# Altium PCB X_TRACK V3.1.PcbDoc (part 1 of 2)
Units mm, origin at the board's own origin, x right, y up, seen from the top; angles counter-clockwise.
Board outline 74 x 42.6 mm, 2 copper layers (Top Layer, Bottom Layer), stack 1.571 mm thick; 150 components, 90 nets, 449 pads, 235 vias.
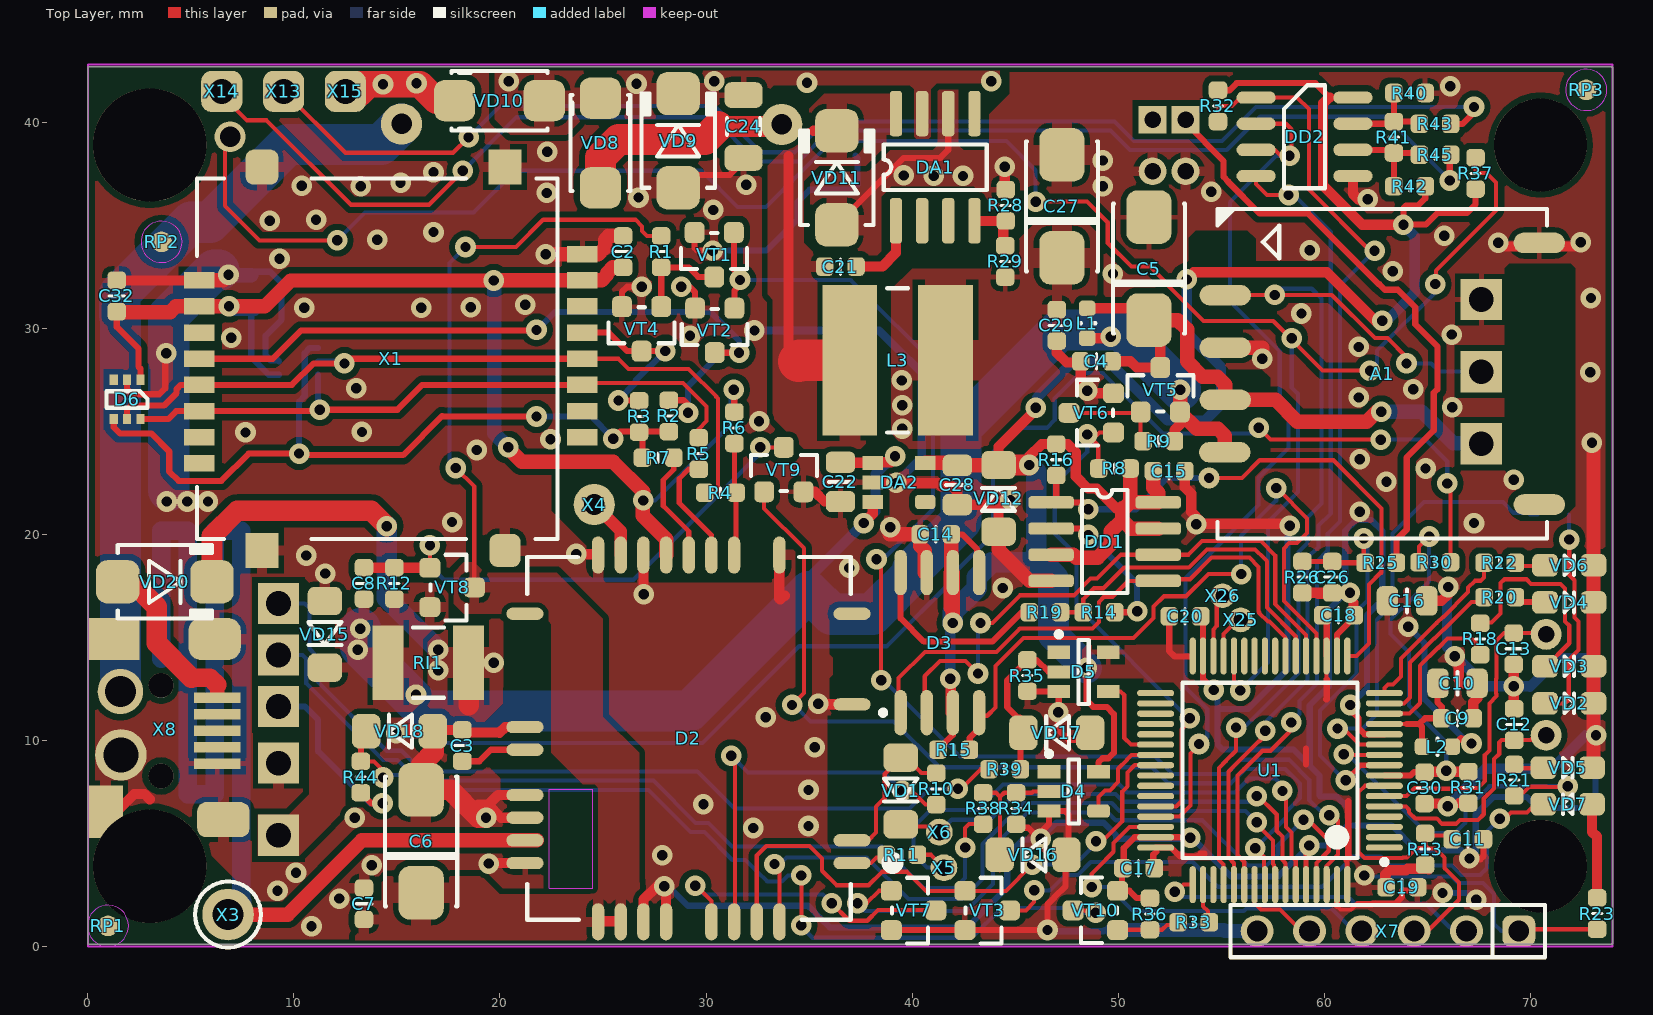
[diagram p0: Top Layer view]
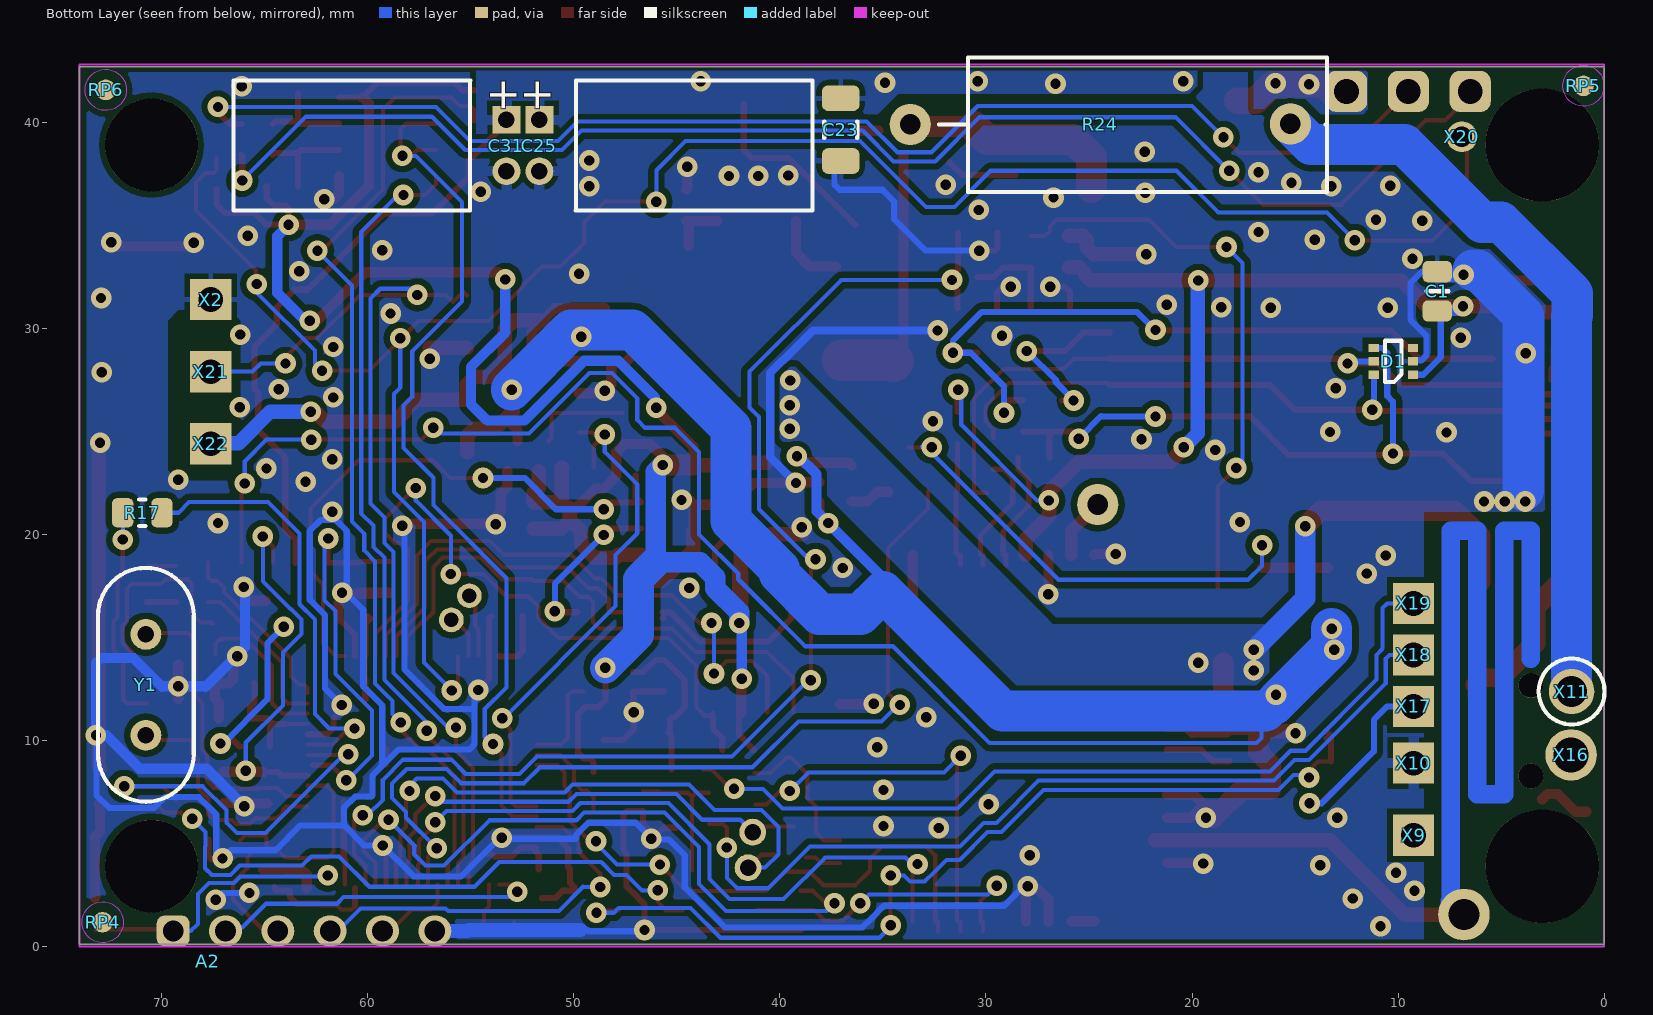
[diagram p1: Bottom Layer view, seen from below]

## Layer stack, top to bottom
Top Solder: solder mask 0.0102, Solder Resist, Dk 3.5
Top Layer: signal copper 0.0356
Dielectric1: dielectric 1.5, FR-4, Dk 4.8
Bottom Layer: signal copper 0.0356
Bottom Solder: solder mask 0.0102, Solder Resist, Dk 3.5

## Board outline
0,0.1 74,0.1 74,42.7 0,42.7

## Design rules (kind name [scope] priority, off if disabled: settings)
Clearance Clearance_1 [InPolygonClass('pol')] p1: gap=0.3
Clearance [All] p2: gap=0.2
ComponentClearance ComponentClearance_CL_SMD_05 [InComponentClass('CL_SMD_05')] p1: gap=0.5 collisioncheckmode=3 verticalgap=0.254 showdistances=FALSE
ComponentClearance [All] p2: gap=0.254 collisioncheckmode=3 verticalgap=0.254 showdistances=FALSE
HoleSize [All] p1: absolutevalues=TRUE maxlimit=10 minlimit=0.025 maxpercent=80.000 minpercent=20.000
MinimumSolderMaskSliver [All] p1 off: minsoldermaskwidth=0.254
PolygonConnect PolygonConnect_PC_2 [InPadClass('PC_2')] p1: connectstyle=Relief reliefconductorwidth=2 reliefentries=4 polygonreliefangle="90 Angle" airgapwidth=0.254
PolygonConnect PolygonConnect_PC_1.5 [InPadClass('PC_1.5')] p2: connectstyle=Relief reliefconductorwidth=1.5 reliefentries=4 polygonreliefangle="90 Angle" airgapwidth=0.254
PolygonConnect PolygonConnect_PC_1 [InPadClass('PC_1')] p3: connectstyle=Relief reliefconductorwidth=1 reliefentries=4 polygonreliefangle="90 Angle" airgapwidth=0.254
PolygonConnect PolygonConnect_PC_0.7 [InPadClass('PC_0.7')] p4: connectstyle=Relief reliefconductorwidth=0.7 reliefentries=4 polygonreliefangle="90 Angle" airgapwidth=0.254
PolygonConnect PolygonConnect_PC_O.5 [InPadClass('PC_0.5')] p5: connectstyle=Relief reliefconductorwidth=0.5 reliefentries=4 polygonreliefangle="90 Angle" airgapwidth=0.254
PolygonConnect PolygonConnect_PC_DC [InPadClass('PC_DC')] p6: connectstyle=Direct reliefconductorwidth=0.254 reliefentries=4 polygonreliefangle="90 Angle" airgapwidth=0.254
PolygonConnect PolygonConnect_vias [IsVia] p7: connectstyle=Direct reliefconductorwidth=0.254 reliefentries=4 polygonreliefangle="90 Angle" airgapwidth=0.254
PolygonConnect [All] p8: connectstyle=Relief reliefconductorwidth=0.254 reliefentries=4 polygonreliefangle="90 Angle" airgapwidth=0.254
RoomDefinition "X_TRACK_MCU V3.1" [InComponentClass('X_TRACK_MCU V3.1')] p1: confinementstyle=ConfineIn formatcopy=TRUE lockcomponents=FALSE outline -30,-30.6 231.725,-30.6 231.725,145.875 -30,145.875
RoomDefinition "X_TRACK_PWR V3.1" [InComponentClass('X_TRACK_PWR V3.1')] p2: confinementstyle=ConfineIn formatcopy=TRUE lockcomponents=FALSE outline -30,-30.6 601,-30.6 601,284.4 -30,284.4
RoutingVias [All] p1: holewidth=0.3 width=0.6 viastyle="Through Hole" minholewidth=0.3 minwidth=0.6 maxholewidth=3 maxwidth=6
SilkToBoardRegionClearance [All] p1 off:
SilkToSilkClearance [All] p1 off: silktosilkclearance=0.2
SilkToSolderMaskClearance SilkscreenOverComponentPads [IsPad] p1 off: minsilkscreentomaskgap=0.2 clearancetoexposedcopper=TRUE
SolderMaskExpansion [All] p1: expansion=0.102
Width [All] p1: maxlimit=10 minlimit=0.2 preferedwidth=0.3
24 further rules are at their usual default settings.

## Classes and differential pairs
component class CL_SMD_05: C1 C2 C3 C4 C6 C7 C8 C9 C10 C11 C12 C13 C14 C15 C16 C17 C18 C19 C20 C21 C22 C23 C24 C26 C27 C28 C29 C30 D1 L3 R1 R2 R3 R4 R5 R7 R9 R10 R11 R12 R13 R14 R15 R16 R17 R18 R19 R20 R21 R22 R23 R24 R25 R26 R28 R29 R30 R31 R32 R33 R34 R36 R37 R38 R39 R40 R41 R42 R43 R44 R45 VD1 VD2 VD3 VD4 VD5 VD6 VD7 VD8 VD9 VD10 VD11 VD12 VD15 VD16 VD17 VD18
pad class PC_2: L3-2
pad class PC_1.5: RI1-1 RI1-2
pad class PC_1: C6-1 C6-2 C27-1 C27-2 L3-1 VD8-1 VD8-2 VD9-1 VD9-2 VD10-1 VD10-2 VD11-1 VD11-2
pad class PC_0.5: C7-1 C7-2 C8-1 C8-2 C21-1 C21-2 C25-1 C25-2 C29-1 C29-2 C31-1 C31-2 D2-8 D2-13 D2-21 D2-34 D2-35 R12-1 R12-2 R13-1 VD15-1 VD15-2 VT8-1 VT8-2 VT8-3 X1-17 X1-18 X1-19 X1-20 X8-6 X8-7 X8-8 X8-9 X10-1
pad class PC_DC: DA1-1 DA1-2 DA1-3 DA1-4 DA1-5 DA1-6 DA1-7 DA1-8 R24-1 R24-2 X8-8 X9-1 X11-1 X15-1 X16-1
component class "X_TRACK_MCU V3.1": A1 A2 C1 C2 C3 C4 C5 C6 C7 C8 C9 C10 C11 C12 C13 C14 C15 C16 C17 C18 C19 C20 C32 D1 D2 D3 D6 DD1 L1 L2 R1 R2 R3 R4 R5 R6 R7 R8 R9 R10 R11 R12 R13 R14 R15 R16 R17 R18 R19 R20 R21 R22 R23 RP1 RP2 RP3 RP4 RP5 RP6 U1 VD1 VD2 VD3 VD4 VD5 VD6 VD7 VT1 VT2 VT3 VT4 VT5 VT6 VT7 VT8 VT9 X1 X2 X3 X4 X5 X6 X7 X21 X22 X25 X26 Y1
component class "X_TRACK_PWR V3.1": C21 C22 C23 C24 C25 C26 C27 C28 C29 C30 C31 D4 D5 DA1 DA2 DD2 L3 R24 R25 R26 R28 R29 R30 R31 R32 R33 R34 R35 R36 R37 R38 R39 R40 R41 R42 R43 R44 R45 RI1 VD8 VD9 VD10 VD11 VD12 VD15 VD16 VD17 VD18 VD20 VT10 X8 X9 X10 X11 X13 X14 X15 X16 X17 X18 X19 X20
polygon class pol: GND_bot GND_top

## Components (designator, comment, footprint, x,y, rotation, side; value= is the part's Value field where it differs from the comment)
A1 "L80" L80 62.825,27.8 r180 top
A2 "AB" AB 67.775,-0.725 r180 bottom locked
C1 "CC0805_100nF" CC0805 8.1,31.8 r90 bottom
C2 "CC0603_100nF" CC0603 25.975,33.725 r270 top
C3 "CC0603_1uF" CC0603 18.175,9.75 r270 top
C4 "CC0603_100nF" CC0603 48.95,28.4 r180 top
C5 "C_TAJ 100uF 6.3V C" 6032_TC 51.5,32.9 r90 top
C6 "C_TAJ 100uF 6.3V C" 6032_TC 16.175,5.1 r90 top
C7 "CC0603_100nF" CC0603 13.4,2.075 r90 top
C8 "CC0603_100nF" CC0603 13.4,17.625 r90 top
C9 "CC0603_10nF" CC0603 66.475,11.075 r0 top
C10 "CC0805_1uF" CC0805 66.475,12.775 r180 top
C11 "CC0603_100nF" CC0603 66.975,5.2 r0 top
C12 "CC0603_22pF" CC0603 69.225,10.775 r90 top
C13 "CC0603_22pF" CC0603 69.2,14.45 r270 top
C14 "CC0603_100nF" CC0603 41.15,20 r180 top
C15 "CC0603_100nF" CC0603 52.475,23.075 r0 top
C16 "CC0805_10uF" CC0805 64.025,16.775 r180 top
C17 "CC0603_100nF" CC0603 51,3.8 r180 top
C18 "CC0603_100nF" CC0603 60.7,16.075 r0 top
C19 "CC0603_100nF" CC0603 63.775,2.875 r0 top
C20 "CC0603_100nF" CC0603 53.25,16.025 r0 top
C21 "CC0603_10nF" CC0603 36.525,33 r0 top
C22 "CC0805_10uF" CC0805 36.525,22.55 r90 top
C23 "CC1206_10uF" CC1206 37.05,39.65 r90 bottom
C24 "CC1206_10uF" CC1206 31.825,39.8 r90 top
C25 "C_ECR_100uF 35V_(D6)" "CAPPR2.5-6.3X11.5 - HR" 51.675,38.875 r180 bottom
C26 "CC0603_10nF" CC0603 60.4,17.925 r270 top
C27 "C_TAJ 100uF 6.3V C" 6032_TC 47.275,35.925 r90 top
C28 "CC0805_10uF" CC0805 42.2,22.4 r90 top
C29 "CC0603_100nF" CC0603 47.028,30.15 r90 top
C30 "CC0603_10nF" CC0603 64.875,7.7 r270 top
C31 "C_ECR_100uF 35V_(D6)" "CAPPR2.5-6.3X11.5 - HL" 53.275,38.875 r180 bottom
C32 "CC0603_100nF" CC0603 1.4,31.575 r90 top
D1 "SMF05C" sc70-6 10.225,28.4 r90 bottom
D2 "SIM800C" SIM800C 21.3,1.3 r180 top locked
D3 "AT45DB" 8S2_N_2 41.35,14.75 r0 top
D4 "SN74AHC1G14DBVR" SOT23-5AN#1 47.85,7.525 r0 top
D5 "SN74AHC1G14DBVR" SOT23-5AN#2 48.325,13.325 r0 top
D6 "SMF05C" sc70-6 1.9,26.55 r180 top
DA1 "TPS5420" SO8 41.125,37.825 r0 top
DA2 "TPS76330DBV" SOT23-5 38.1,23.475 r0 top
DD1 "FM25CL64" SO8 49.35,19.65 r270 top
DD2 "SN75176" 8S1_L 59.05,39.3 r0 top
L1 "L_CIC10P601NC" BLM18 48.5,30.25 r270 top
L2 "L_CIC10P601NC" BLM18 65.5,9.7 r180 top
L3 "CDRH6D38" CDRH6D38 39.3,28.45 r0 top
R1 "RC0603 10k" RC0603 27.825,33.725 r90 top
R2 "RC0603 1k" RC0603 28.2,25.75 r90 top
R3 "RC0603 1k" RC0603 26.75,25.725 r90 top
R4 "RC0603 22R" RC0603 30.7,22.025 r180 top
R5 "RC0603 22R" RC0603 29.65,23.925 r90 top
R6 "RC0603 10k" RC0603 31.375,25.175 r90 top
R7 "RC0603 22R" RC0603 27.675,23.725 r180 top
R8 "RC0603 1k" RC0603 49.825,23.2 r180 top
R9 "RC0603 100k" RC0603 51.975,24.525 r180 top
R10 "RC0603 10k" RC0603 41.175,7.65 r90 top
R11 "RC0603 120R" RC0603 39.5,4.45 r0 top
R12 "RC0603 100k" RC0603 14.875,17.625 r90 top
R13 "RC0603 10k" RC0603 64.9,4.725 r90 top
R14 "RC0603 1k" RC0603 49.075,16.225 r180 top
R15 "RC0603 10k" RC0603 42.025,9.55 r0 top
R16 "RC0603 10k" RC0603 47,23.625 r270 top
R17 "RC0805 1k" RC0805 70.95,21.05 r0 bottom
R18 "RC0603 300R" RC0603 67.575,14.925 r270 top
R19 "RC0603 1k" RC0603 46.45,16.225 r0 top
R20 "RC0603 300R" RC0603 68.525,16.95 r180 top
R21 "RC0603 300R" RC0603 69.225,8.075 r270 top
R22 "RC0603 300R" RC0603 68.525,18.625 r180 top
R23 "RC0603 300R" RC0603 73.25,1.6 r90 top
R24 "R_MFR03W" "MFR300- 3W-23-17.5X6.5" 22.175,39.9 r0 bottom
R25 "RC0603 15k" RC0603 62.75,18.625 r180 top
R26 "RC0603 1k" RC0603 58.95,17.925 r270 top
R28 "RC0603 3k3" RC0603 44.55,35.975 r90 top
R29 "RC0603 8k2" RC0603 44.525,33.25 r90 top
R30 "RC0603 100k" RC0603 65.375,18.65 r180 top
R31 "RC0603 100k" RC0603 67,7.725 r270 top
R32 "RC0603 15k" RC0603 54.85,40.8 r270 top
R33 "RC0603 3k3" RC0603 53.675,1.175 r0 top
R34 "RC0603 100k" RC0603 45.05,6.7 r270 top
R35 "RC0603 100k" RC0603 45.6,13.15 r270 top
R36 "RC0603 33k" RC0603 51.55,1.575 r90 top
R37 "RC0603 5k1" RC0603 67.35,37.525 r90 top
R38 "RC0603 4k7" RC0603 43.45,6.7 r270 top
R39 "RC0603 4k7" RC0603 44.5,8.6 r180 top
R40 "RC0603 1k5" RC0603 64.15,41.425 r180 top
R41 "RC0603 120R" RC0603 63.387,39.275 r270 top
R42 "RC0603 1k5" RC0603 64.15,36.9 r0 top
R43 "RC0603 120R" RC0603 65.387,39.925 r0 top
R44 "RC0603 10R" RC0603 13.25,8.225 r270 top
R45 "RC0603 120R" RC0603 65.387,38.425 r0 top
RI1 "POLY_PTS" "FSMD1812 Series" 16.525,13.775 r0 top
RP1 "Reper point" REPER_1_2 0.975,1 r0 top
RP2 "Reper point" REPER_1_2 3.575,34.2 r90 top
RP3 "Reper point" REPER_1_2 72.725,41.575 r90 top
RP4 "Reper point" REPER_1_2 72.875,1.175 r90 bottom
RP5 "Reper point" REPER_1_2 1,41.775 r90 bottom
RP6 "Reper point" REPER_1_2 72.725,41.575 r90 bottom
U1 "STM32F103RCT6" LQFP64_N 57.375,8.55 r180 top
VD1 "BAS85" SOD80D_C 39.45,7.55 r270 top
VD2 "LED_KP-2012EC(0805)_1" KP-2012EC 71.9,11.8 r0 top
VD3 "LED_KP-2012EC(0805)_1" KP-2012EC 71.9,13.6 r0 top
VD4 "LED_KP-2012EC(0805)_1" KP-2012EC 71.9,16.7 r0 top
VD5 "LED_KP-2012EC(0805)_1" KP-2012EC 71.825,8.675 r0 top
VD6 "LED_KP-2012EC(0805)_1" KP-2012EC 71.9,18.5 r0 top
VD7 "LED_KP-2012EC(0805)_1" KP-2012EC 71.825,6.9 r180 top
VD8 "M7" SMA/DO-214AC 24.875,40.675 r270 top
VD9 "Suppressor" SMB/DO-214AA 28.65,36.825 r270 top
VD10 "M7" SMA/DO-214AC 18.3,41.05 r0 top
VD11 "SS24" SMB/DO-214AA 36.35,35.025 r270 top
VD12 "Zener" SOD80D_C 44.2,21.75 r90 top
VD15 "Zener" SOD80D_C 11.5,15.15 r270 top
VD16 "Zener" SOD80D_C 45.875,4.45 r180 top
VD17 "Zener" SOD80D_C 47.025,10.375 r180 top
VD18 "LL4148" SOD80D_C 15.125,10.45 r180 top
VD20 "SS24" SMB/DO-214AA 1.45,17.7 r180 top
VT1 "PDTC123ET" SOT23 30.4,33.575 r180 top
VT2 "PDTC123ET" SOT23 30.425,29.9 r180 top
VT3 "PDTC123ET" SOT23 43.65,1.75 r270 top
VT4 "PDTC123ET" SOT23 26.875,29.975 r180 top
VT5 "IRLML6302" SOT23 52.05,27.025 r0 top
VT6 "PDTC123ET" SOT23 48.7,25.9 r90 top
VT7 "PDTC123ET" SOT23 40.075,1.75 r270 top
VT8 "IRLML6401" SOT23 17.675,17.425 r270 top
VT9 "PDTC123ET" SOT23 33.775,23.15 r0 top
VT10 "BC817" SOT23 48.9,1.75 r90 top
X1 "SI13С-08201" SI13C-08201 14.6,28.525 r270 top locked
X2 "Con 1" TP_0.8/1.5#1 67.625,31.4 r180 bottom
X3 "Con_1" TP_1.5/2.5#1 6.8,1.55 r0 top
X4 "Con_1" TP_1/2#1 24.575,21.45 r0 top
X5 "Con 1" TP_0.8/1.5#2 41.55,3.825 r0 top
X6 "Con 1" TP_0.8/1.5#2 41.325,5.55 r0 top
X7 "CON_1x6_" PLS6 69.45,0.75 r180 top
X8 "MSB-SW-5B" MSB-SW-5B 3.4,10.475 r270 top
X9 "Con 1" TP_1/2#2 9.25,5.4 r180 bottom
X10 "Con 1" TP_1/2#2 9.25,8.9 r180 bottom
X11 "Con_1" TP_1.5/2.5#2 1.575,12.375 r180 bottom
X13 "Con_1" TP_1/2#3 9.5,41.5 r0 top
X14 "Con_1" TP_1/2#3 6.5,41.5 r0 top
X15 "Con_1" TP_1/2#3 12.5,41.5 r0 top
X16 "Con_1" TP_1/2#4 1.6,9.3 r90 bottom
X17 "Con_1" TP_1/2#2 9.25,11.65 r270 bottom
X18 "Con_1" TP_1/2#2 9.25,14.15 r0 bottom
X19 "Con_1" TP_1/2#2 9.25,16.65 r180 bottom
X20 "Con_1" TP_1/2#5 6.9,39.3 r180 bottom
X21 "Con 1" TP_0.8/1.5#1 67.625,27.9 r180 bottom
X22 "Con 1" TP_0.8/1.5#1 67.625,24.4 r90 bottom
X25 "Con 1" "TP_0.5/1.0 - WITHOUT SILKSCREEN" 55.95,15.85 r90 top
X26 "Con 1" "TP_0.5/1.0 - WITHOUT SILKSCREEN" 55.075,17.025 r90 top
Y1 "XTAL" CRYSTAL 70.775,12.7 r270 bottom

## Footprints (in the part's own frame and the unit in brackets; to place one, negate y for a bottom-side part, rotate by r counter-clockwise, add the part's x,y. Pads: shape width x height; smd on the part's side, far side on the other; paste and mask are expansions set on the pad)
8S1_L [mm] "8-Pin Small Outline Integrated Circuit 1.27 mm Pitch, IPC High Density"
  oval 1.9x0.6 smd: 1(-2.35,1.905) 2(-2.35,0.635) 3(-2.35,-0.635) 4(-2.35,-1.905) 5(2.35,-1.905) 6(2.35,-0.635) 7(2.35,0.635) 8(2.35,1.905)
  silkscreen extent -1,-2.5 1,2.5, body extent -1.95,-2.45 1.95,2.45, height 1.73
8S2_N_2 [mm] "8-Pin Small Outline Package 1.27 mm Pitch, IPC Medium Density"
  oval 0.6x2.2 smd: 1(-1.905,-3.4) 2(-0.635,-3.4) 3(0.635,-3.4) 4(1.905,-3.4) 5(1.905,3.4) 6(0.635,3.4) 7(-0.635,3.4) 8(-1.905,3.4)
  silkscreen extent -2.88,-3.52 -2.63,-3.28, body extent -3.2,-3.2 3.2,3.2, height 1.2
6032_TC [mm] "Capacitor, SM Tantalum; Body 6.0 x 3.2 mm (LxW typ)"
  rrect50% 2.6x2.2 smd: 1(-2.5,0) 2(2.5,0)
  silkscreen extent -3.15,-1.75 3.15,1.75, body extent -3.15,-1.75 3.15,1.75, height 3.4
AB [mm]
  body extent 0,0 53,34, height 7
BLM18 [mm] "EMI Filter Beads 0603"
  rrect50% 0.75x0.8 smd: 1(-0.725,0) 2(0.725,0)
  silkscreen extent 0,-0.4 0,0.4, body extent -0.8,-0.4 0.8,0.4, height 0.95
"CAPPR2.5-6.3X11.5 - HL" [mm] "Capacitor, Electrolytic, Radial; Body 6.3 x 11.5 mm (Dia.xH typ); Pin Spacing 2.5 mm (typ)"
  rect 1.35x1.35 hole 0.8: 1(0,1.25)
  round 1.35 hole 0.8: 2(0,-1.25)
  silkscreen extent -13.25,-3.15 -1.75,3.15, body extent -13.25,-3.15 -1.75,3.15, height 6.35
"CAPPR2.5-6.3X11.5 - HR" [mm] "Capacitor, Electrolytic, Radial; Body 6.3 x 11.5 mm (Dia.xH typ); Pin Spacing 2.5 mm (typ)"
  rect 1.35x1.35 hole 0.8: 1(0,1.25)
  round 1.35 hole 0.8: 2(0,-1.25)
  silkscreen extent 1.75,-3.15 13.25,3.15, body extent 1.75,-3.15 13.25,3.15, height 6.35
CC0603 [mm]
  rrect50% 0.85x0.9 smd: 1(0.762,0) 2(-0.762,0)
  silkscreen extent 0,-0.38 0,0.38, body extent -0.87,-0.48 0.87,0.48, height 0.85
CC0805 [mm]
  rrect50% 1.034x1.42 smd: 1(-0.953,0) 2(0.953,0)
  silkscreen extent 0,-0.55 0,0.55, body extent -1.07,-0.7 1.07,0.7, height 0.65
CC1206 [mm]
  rrect50% 1.25x1.84 smd: 1(-1.524,0) 2(1.524,0)
  silkscreen extent -0.4,-0.8 0.4,0.8, body extent -1.68,-0.87 1.68,0.87, height 1.65
CDRH6D38 [mm]
  rect 2.65x7.3 smd: 1(-2.325,0) 2(2.325,0)
  silkscreen extent -0.5,-3.5 0.5,3.5, body extent -3.5,-3.5 3.5,3.5, height 4
CRYSTAL [mm]
  round 1.5 hole 0.8 mask+0.102: 1(-2.45,0) 2(2.45,0)
  silkscreen extent -5.68,-2.32 5.68,2.32, body extent -5.67,-2.32 5.68,2.32, height 3.6
"FSMD1812 Series" [mm] "Surface Mount PTC"
  rect 1.5x3.6 smd: 1(-1.95,0) 2(1.95,0)
  silkscreen extent -0.75,-1.7 0.75,1.7, body extent -2.37,-1.7 2.35,1.7, height 0.9
KP-2012EC [mm] "2.0mmx1.25mm SMT LED,1.1mm thickness."
  rrect50% 1.25x1.1 smd: 1(-1.175,0) 2(1.175,0)
  silkscreen extent -0.23,-0.48 0.23,0.48, body extent -1,-0.63 1,0.63, height 1.1
L80 [mm] "GPS Module Series"
  oval 2.5x1 smd: 2(7.62,-3.81) 3(7.62,-1.27) 4(7.62,1.27) 5(7.645,3.81) 7(-7.62,6.35) 12(-7.62,-6.35)
  silkscreen extent -8,-8 8,8, body extent -8,-8 8,8, height 6.55
LQFP64_N [mm] "Thin QFP, 64-Leads, Body 10x10mm, Pitch 0.5mm, IPC Medium Density"
  oval 1.8x0.3 smd: 1(-5.55,3.75) 2(-5.55,3.25) 3(-5.55,2.75) 4(-5.55,2.25) 5(-5.55,1.75) 6(-5.55,1.25) 7(-5.55,0.75) 8(-5.55,0.25) 9(-5.55,-0.25) 10(-5.55,-0.75) 11(-5.55,-1.25) 12(-5.55,-1.75) 13(-5.55,-2.25) 14(-5.55,-2.75) 15(-5.55,-3.25) 16(-5.55,-3.75) 33(5.55,-3.75) 34(5.55,-3.25) 35(5.55,-2.75) 36(5.55,-2.25) 37(5.55,-1.75) 38(5.55,-1.25) 39(5.55,-0.75) 40(5.55,-0.25) 41(5.55,0.25) 42(5.55,0.75) 43(5.55,1.25) 44(5.55,1.75) 45(5.55,2.25) 46(5.55,2.75) 47(5.55,3.25) 48(5.55,3.75)
  oval 0.3x1.8 smd: 17(-3.75,-5.55) 18(-3.25,-5.55) 19(-2.75,-5.55) 20(-2.25,-5.55) 21(-1.75,-5.55) 22(-1.25,-5.55) 23(-0.75,-5.55) 24(-0.25,-5.55) 25(0.25,-5.55) 26(0.75,-5.55) 27(1.25,-5.55) 28(1.75,-5.55) 29(2.25,-5.55) 30(2.75,-5.55) 31(3.25,-5.55) 32(3.75,-5.55) 49(3.75,5.55) 50(3.25,5.55) 51(2.75,5.55) 52(2.25,5.55) 53(1.75,5.55) 54(1.25,5.55) 55(0.75,5.55) 56(0.25,5.55) 57(-0.25,5.55) 58(-0.75,5.55) 59(-1.25,5.55) 60(-1.75,5.55) 61(-2.25,5.55) 62(-2.75,5.55) 63(-3.25,5.55) 64(-3.75,5.55)
  silkscreen extent -5.68,-4.25 4.25,4.57, body extent -5,-5 5,5, height 1.6
"MFR300- 3W-23-17.5X6.5" [mm] "Resistor 3W normal , Axial L=23mm; Body 17.5x 6.5 mm (LxDia. max), Lead Dia. 0.8mm (max)"
  round 2 hole 1: 1(-6.95,-0.025) 2(11.5,0)
  silkscreen extent -8.73,-3.25 10.1,3.27, body extent -8.77,-3.25 11.7,3.25, height 6.55
MSB-SW-5B [mm]
  rect 0.5x2.25 smd: 1(-1.6,2.875) 2(-0.8,2.875) 3(0,2.875) 4(0.8,2.875) 5(1.6,2.875)
  rrect60% 2.032x2.54 smd: 6(-4.45,2.75)
  rect 2.032x2.54 smd: 7(-4.445,-2.159)
  rect 2.54x1.7 smd: 8(3.937,-2.54)
  rrect50% 1.7x2.54 smd: 9(4.318,3.175)
  round 1.2 hole 1.2 unplated: 10(-2.2,0.15) 11(2.2,0.15)
  body extent -3.85,-5.75 3.85,3.45, height 3.95
PLS6 [mm] "Series 2.54mm(.100\") Single Row Pin Headers"
  rrect50% 1.6x1.5 hole 1: 1(0,0)
  oval 1.6x1.5 hole 1: 2(2.54,0) 3(5.08,0) 4(7.62,0) 5(10.16,0) 6(12.7,0)
  silkscreen extent -1.27,-1.27 14,1.27, body extent -1.27,-1.28 13.98,1.27, height 8.54
RC0603 [mm]
  rrect50% 0.85x0.9 smd: 1(0.762,0) 2(-0.762,0)
  silkscreen extent 0,-0.23 0,0.23, body extent -0.87,-0.48 0.87,0.48, height 0.85
RC0805 [mm]
  rrect50% 1.034x1.42 smd: 1(-0.953,0) 2(0.953,0)
  silkscreen extent -0.15,-0.65 0.15,0.65, body extent -1.07,-0.7 1.07,0.7, height 0.65
REPER_1_2 [mm]
  round 1 smd paste-0.5 mask+0.5: 0(0,0)
  Top Layer keep-out circle w0.001: c0,0 r1
  body extent -0.5,-0.5 0.5,0.5, height 0
sc70-6 [mm] "SC70 Wide 1.25mm"
  rect 0.4x0.5 smd: 1(-0.65,-0.95) 2(0,-0.95) 3(0.65,-0.95) 4(0.65,0.95) 5(0,0.95) 6(-0.65,0.95)
  silkscreen extent -1,-0.4 1,0.4, body extent -1,-0.6 1,0.6, height 1
SI13C-08201 [mm] "SIM Card Socket Dual Port Type"
  rect 0.8x1.5 smd: 1(-3.81,9.395) 2(-1.27,9.395) 3(1.27,9.395) 4(3.81,9.395) 5(-5.08,9.395) 6(-2.54,9.395) 7(0,9.395) 8(2.54,9.395) 9(-2.54,-9.195) 10(0,-9.195) 11(2.54,-9.195) 12(5.08,-9.195) 13(-3.81,-9.195) 14(-1.27,-9.195) 15(1.27,-9.195) 16(3.81,-9.195)
  rrect50% 1.6x1.5 smd: 17(9.3,5.65)
  rect 1.7x1.6 smd: 18(9.3,-6.15) 19(-9.3,5.65)
  rrect50% 1.7x1.6 smd: 20(-9.3,-6.15)
  silkscreen extent -8.75,-9.3 8.75,8.2, body extent -8.75,-17.6 8.75,8.2, height 3.25
SIM800C [mm]
  oval 1.8x0.6 smd: 1(-15.787,-2.75) 2(-15.787,-3.85) 8(-15.787,-10.45) 12(-15.787,-14.85) 22(0.088,-14.85) 27(0.088,-9.35) 28(0.088,-8.25) 30(0.088,-6.05) 31(0.088,-4.95) 32(0.088,-3.85) 33(0.088,-2.75)
  oval 0.6x1.8 smd: 13(-12.262,-17.7) 15(-10.062,-17.7) 16(-8.962,-17.7) 17(-7.862,-17.7) 18(-6.762,-17.7) 19(-5.662,-17.7) 20(-4.562,-17.7) 21(-3.462,-17.7) 34(-3.463,0.1) 35(-4.563,0.1) 36(-5.663,0.1) 37(-6.763,0.1) 39(-8.962,0.1) 40(-10.062,0.1) 41(-11.162,0.1) 42(-12.263,0.1)
  Top Layer keep-out lines w0.01: -1.1,-1.525 -3.2,-1.525 -3.2,-6.325 -1.1,-6.325 -1.1,-1.525
  silkscreen extent -17.77,-17.6 -0.02,0, body extent -15.71,-17.6 -0.01,0, height 2.3
SMA/DO-214AC [mm]
  rrect50% 2x2 smd: 1(3.85,0) 2(-0.5,0)
  silkscreen extent -0.65,-1.45 4,1.45, body extent -0.65,-1.45 4,1.45, height 2.44
SMB/DO-214AA [mm]
  rrect50% 2.1x2.1 smd: 1(0,0) 2(-4.572,0)
  silkscreen extent -4.57,-1.78 0,1.78, body extent -4.57,-1.78 0,1.78, height 2.45
SO8 [mm] "Small Outline; 8 Leads; Body Width 3.9 mm; Pitch 1.27 mm"
  rrect50% 0.6x2.2 smd: 1(-1.905,-2.6) 2(-0.635,-2.6) 3(0.635,-2.6) 4(1.905,-2.6) 5(1.905,2.6) 6(0.635,2.6) 7(-0.635,2.6) 8(-1.905,2.6)
  silkscreen extent -2.5,-1.1 2.5,1.1, body extent -2.45,-1.95 2.45,1.95, height 1.73
SOD80D_C [mm]
  rrect50% 1.38x1.68 smd: 1(-1.619,0) 2(1.619,0)
  silkscreen extent -0.6,-0.8 0.51,0.8, body extent -1.73,-0.8 1.78,0.8, height 1.6
SOT23 [mm]
  rrect50% 0.96x1.02 smd: 1(-0.952,-1.08) 2(0.953,-1.079) 3(0,1.079)
  silkscreen extent -1.59,-1.05 1.6,0.7, body extent -1.5,-0.7 1.5,0.7, height 1.1
SOT23-5 [mil]
  rect 39x27 smd: 1(0,0) 2(0,-37.4) 3(0,-74.8) 5(100,0)
  rrect50% 39x27 smd: 4(100,-74.8)
  body extent 15,-98 85,24, height 57
SOT23-5AN#1 [mm] "SOT23, 5-Leads, Body 2.9x1.6mm, Pitch 0.95mm, Lead Span 2.8mm, IPC Medium Density"
  rect 1.1x0.65 smd: 1(-1.2,0.95) 2(-1.2,0) 3(-1.2,-0.95) 5(1.2,0.95)
  rrect50% 1.1x0.65 smd: 4(1.2,-0.95)
  silkscreen extent -1.32,-1.55 0.25,1.95, body extent -0.9,-1.55 0.9,1.55, height 1.45
SOT23-5AN#2 [mm] "SOT23, 5-Leads, Body 2.9x1.6mm, Pitch 0.95mm, Lead Span 2.8mm, IPC Medium Density"
  rect 1.1x0.65 smd: 1(-1.2,0.95) 2(-1.2,0) 3(-1.2,-0.95) 4(1.2,-0.95) 5(1.2,0.95)
  silkscreen extent -1.32,-1.55 0.25,1.95, body extent -0.9,-1.55 0.9,1.55, height 1.45
"TP_0.5/1.0 - WITHOUT SILKSCREEN" [mm]
  round 1.2 hole 0.7: 1(0,0)
  body extent -0.3,-0.3 0.3,0.3, height 0
TP_0.8/1.5#1 [mm]
  rect 2x2 hole 1.2 mask+0.102: 1(0,0)
  body extent -0.76,-0.75 0.74,0.75, height 0.01
TP_0.8/1.5#2 [mm]
  round 1.3 hole 0.8 mask+0.102: 1(0,0)
  body extent -0.51,-0.5 0.49,0.5, height 0.01
TP_1.5/2.5#1 [mm]
  round 2.5 hole 1.5 mask+0.102: 1(0,0)
  silkscreen extent -1.6,-1.6 1.6,1.6, body extent -1.25,-1.25 1.24,1.25, height 0.01
TP_1.5/2.5#2 [mm]
  round 2.2 hole 1.5 mask+0.102: 1(0,0)
  silkscreen extent -1.6,-1.6 1.6,1.6, body extent -1.26,-1.25 1.24,1.25, height 0.01
TP_1/2#1 [mm]
  round 2 hole 1 mask+0.102: 1(0,0)
  body extent -1,-1 0.99,1, height 0.01
TP_1/2#2 [mm]
  rect 2x2 hole 1.2 mask+0.102: 1(0,0)
  body extent -1.01,-1 0.99,1, height 0.01
TP_1/2#3 [mm]
  rrect50% 2x2 hole 1.2 mask+0.102: 1(0,0)
  body extent -1.01,-1 0.99,1, height 0.01
TP_1/2#4 [mm]
  round 2.5 hole 1.7 mask+0.102: 1(0,0)
  body extent -1.01,-1 0.99,1, height 0.01
TP_1/2#5 [mm]
  round 1.5 hole 1 mask+0.102: 1(0,0)
  body extent -1.01,-1 0.99,1, height 0.01

## Part data
A1: "Quectel  Slim GPS Module  Integrated Patch Antenna"
C1: "Capacitor SMD 0805 X7R 100nF 20% 50V"
C2 C4 C7 C8 C11 C14 C15 C17 C18 C19 C20 C29 C32: "Capacitor SMD 0603 X7R 100nF 20% 50V"
C3: "Capacitor SMD 0603 X7R 1uF 20% 10V"
C5 C6 C27: "Capacitor tantall"
C9 C21 C26 C30: "Capacitor SMD 0603 X7R 10nF 20% 50V"
C10: "Capacitor SMD 0805 Y5V 1uF 20% 16V"
C12 C13: "Capacitor SMD 0603 NPO 22pF 5% 50V"
C16 C22 C28: "Capacitor SMD 0805 Y5V 10uF 20% 16V"
C23 C24: "Capacitor SMD 1206 X5R 10uF 20% 50V"
C25 C31: "Standard Capacitor polarized Radial leads, cylindrical aluminum case,"
D1 D6: "TVS Diode Array For ESD and Latch-Up Protection"
D4 D5: "SINGLE  SCHMITT-TRIGGER  INVERTER  GATE"
DD2: "DRIVER RS-422/DIFFERENTIAL DRIVER AND RECEIVER PAIR"
L1 L2: "SMD inductance 750mA"
R1 R6 R10 R13 R15 R16: "Resistor  SMD RC0603 5% 10k"
R2 R3 R8 R14 R19 R26: "Resistor  SMD 0603  5% 1k"
R4 R5 R7: "Resistor  SMD 0603 5% 22R"
R9 R12 R30 R31 R34 R35: "Resistor  SMD 0603 5% 100k"
R11 R41 R43 R45: "Resistor  SMD 0603 5% 120R"
R17: "Resistor  SMD 0805 5% 1k"
R18 R20 R21 R22 R23: "Resistor  SMD 0603 5% 300R"
R24: "Resistor  axial 3W"
R25 R32: "Resistor  SMD RC0603 5% 15k"
R28 R33: "Resistor  SMD 0603  5% 3k3"
R29: "Resistor  SMD 0603  5% 8k2"
R36: "Resistor  SMD 0603 5% 33k"
R37: "Resistor  SMD 0603 5% 5k1"
R38 R39: "Resistor  SMD 0603 5% 4k7"
R40 R42: "Resistor  SMD 0603  5% 1k5"
R44: "Resistor  SMD 0603 5% 10R"
RI1: library part FSMD110-16, "Polymeric PTC resettable fuses"
RP1 RP2 RP3 RP4 RP5 RP6: "Reper point 1_2 mm"
U1: "STM32 ARM-based 32-bit MCU Performance Line with 256 kB Flash, 48 kB Internal RAM, -40 to +85°C Temperature, 64-Pin LQFP, Tray"
VD1: "SMD Diod BAS85"
VD2 VD3 VD4 VD5 VD6 VD7: "2.0mmx1.25mm SMT LED,1.1mm thickness High Efficiency Red"
VD8 VD10: "SURFACE MOUNT GENERAL RECTIFIER"
VD9: "TRANSIENT VOLTAGE SUPPRESSORS"
VD11 VD20: "SMD Diod 2A 40V"
VD12 VD15 VD16 VD17: "Zener diode"
VD18: "SMD Diod LL4148"
VT1 VT2 VT3 VT4 VT6 VT7 VT9: "NPN Digital transistor with bult-in resistor 2k  100mA/50V"
VT5: "P-Channel Power MOSFET 20V 0.78A(25`C)"
VT10: "NPN general-purpose transistors, 45V, 500mA"
X1: "Dual SIM Card Connector h=3.0mm max"
X2 X3 X4 X5 X6 X9 X10 X11 X13 X14 X15 X16 X17 X18 X19 X20 X21 X22 X25 X26: "Contact"
X7: "CON_1x6"
Y1: "Crystal Oscillator"

## Free pads (board coordinates)
  round 5.5 hole 5.5 unplated: ""(3,3.9) ""(3,38.9)
  round 4.5 hole 4.5 unplated: ""(70.5,3.9) ""(70.5,38.9)

## Via types
v1: diameter 1, hole 0.5, Top Layer to Bottom Layer, tented both sides, 235 vias

## Nets (pads, with @x,y where several pads share a name; then routed paths per layer and width w, separated by ;. In a path a pad name is that pad's centre, name@x,y a point inside that pad or via, vN(x,y) a via of type N, cw(c..) or ccw(c..) an arc to the next point about the centre after c; other vN are vias at no path point)
+3V: C14.2 C15.2 C16.2 C17.2 C18.2 C19.2 C20.2 C28.2 D3.3 D3.5 D3.6 D4.5 D5.5 DA2.5 DD1.3 DD1.7 DD1.8 DD2.8 L2.1 R8.2 R13.2 R15.2 R16.2 R23.2 R32.2 R37.2 R42.1 U1.19 U1.32 U1.48 U1.64 VD12.2 X7.1 | length 164.9
  Top Layer w0.2: 60.125,12.975 U1.19@60.125,14.1 ; U1.64@61.125,3 61.125,4.15 ; X7.1@69.475,0.925 69.562,0.838 R23.2@73.25,0.838
  Top Layer w0.3: R15.2@41.263,9.55 41.985,10.272 D3.3@41.985,11.35 ; C14.2@41.912,20 42.437,20 43.155,19.282 D3.5@43.155,18.15 ; v1(48.475,13.525) 48.475,11.95 48.8,11.625 49.45,11.625 49.8,11.275 49.8,9.4 49.535,9.135 49.25,9.135 49.05,8.935 D4.5@49.05,8.475 ; C17.2@51.712,3.75 51.712,4.462 51.85,4.6 ; U1.48@51.825,4.8 52.575,4.8 53,4.375 53.873,4.375 54.007,4.509 54.191,4.509 54.2,4.5 ; C20.2@52.488,16.025 52.488,14.337 52.75,14.075 53.6,14.075 U1.32@53.625,14.1 ; R32.2@54.85,41.562 55.412,41.562 55.755,41.905 59.57,41.905 60.27,41.205 DD2.8@61.4,41.205 ; 59.128,8.828 59.128,9.597 ; C18.2@60.013,16.025 59.9,15.912 59.875,15.912 60.125,15.662 U1.19@60.125,14.1 ; 60.105,12 60.125,12 60.125,12.975 ; 61.1,4.175 61.175,4.25 61.175,7.05 ; v1@63.85,35.1 63.85,35.832 63.968,35.95 64.55,35.95 64.912,36.312 R42.1@64.912,36.9 ; v1@63.9,35.05 64.95,35.05 65.5,35.6 66.925,35.6 67.35,36.025 R37.2@67.35,36.763 ; L2.1@66.2,9.7 L2.1@66.225,9.7 66.65,10.125 66.924,9.851 v1(67.153,9.851)
  Top Layer w0.5: v1(41.85,13) 41.885,12.965 D3.3@41.885,11.35 ; VD12.2@44.2,23.369 44.2,24.25 46,26.05 v1(46,26.15) ; v1(45.694,23.369) 45.694,23.794 46.287,24.387 R16.2@47,24.387 47.552,24.387 47.95,23.989 47.95,22.814 48.539,22.225 48.964,22.225 49.914,21.275 50.2,21.275 ; v1(53.328,32.377) 53.678,32.727 60.124,32.727 62.476,30.375 v1(62.825,30.375) ; 60.27,41.205 60.23,41.205 59.95,40.925 59.95,36.925 59.975,36.9 60.025,36.85 61.85,35.025 v1(63.85,35.025) ; C19.2@62.963,2.825 62.963,3.488 63.175,3.7 63.975,3.7 64.05,3.775 65.038,3.775 R13.2@65.075,3.738
  Top Layer w0.7: DA2.5@40.64,23.475 42.077,23.475 C28.2@42.2,23.353 44.183,23.353 VD12.2@44.2,23.369 ; 41.885,16.435 D3.6@41.885,18.15 ; D3.6@41.912,18.177 C14.2@41.912,20 ; v1(41.977,15.701) 41.985,15.709 D3.6@41.985,18.15 ; DD1.3@46.75,19.015 47.835,19.015 47.975,18.875 49.006,18.875 49.65,19.519 49.65,20.15 50.2,20.7 ; R8.2@50.562,23.25 50.586,23.226 50.586,21.555 ; C15.2@51.713,23.075 51.713,22.262 51.95,22.025 DD1.8@51.95,21.555 50.586,21.555 ; DD1.7@51.95,20.285 50.615,20.285 50.2,20.7 ; 50.2,20.7 50.2,21.275 50.306,21.275 50.586,21.555
  Top Layer w1: VD12.2@44.2,23.369 v1(45.694,23.369)
  Bottom Layer w0.2: v1(61.95,3.45) 61.998,3.402 66.177,3.402 66.504,3.075 67.719,3.075 68.25,2.544 68.25,1.1 68.6,0.75 X7.1@69.3,0.75 ; X7.1@69.45,0.75 X7.1@69.3,0.75 ; X7.1@69.475,0.925 X7.1@69.3,0.75
  Bottom Layer w0.3: v1(64.078,15.526) 64.875,14.729 64.875,12 67.024,9.851 v1(67.153,9.851)
  Bottom Layer w0.5: v1(41.85,13) 41.85,16.4 ; 46.075,26.65 47.851,28.426 49.502,28.426 52.404,25.525 54.2,25.525 55,26.325 55,28.125 53.328,29.797 v1(53.328,32.377) ; v1(62.825,30.375) 63.05,30.375 64.4,31.725 64.4,34.475 v1(63.85,35.025)
  Bottom Layer w1: v1(41.977,15.701) 41.977,16.216 41.975,16.218 43.15,17.393 43.15,17.918 43.882,18.65 45.6,18.65 ; v1(45.694,23.369) 46.025,23.039 46.025,18.325
  Bottom Layer w1.5: 46.05,18.65 46.875,17.825 46.875,15.125 v1(48.475,13.525)
+4.2V: A1.5 C8.2 C22.2 DA2.1 DA2.3 L1.2 R9.2 R12.2 R30.2 RI1.1 VD15.2 VT5.2 VT8.2 X9.1 | length 141.3
  Top Layer w0.2: v1(56.825,25.175) 57.4,24.6 v1(62.75,24.6) ; v1(65.978,22.476) 66.137,22.317 R30.2@66.137,18.65
  Top Layer w0.5: C22.2@36.527,23.35 36.652,23.475 DA2.1@38.1,23.475 38.125,23.5 v1@38.975,23.5 ; v1(37.652,20.551) 38.1,20.999 DA2.3@38.1,21.575 ; L1.2@48.5,29.525 49.575,29.525 v1(49.65,29.6) ; R9.2@52.737,24.525 52.737,25.062 53.003,25.328 VT5.2@53.003,25.946
  Top Layer w0.7: v1(53.025,27.025) 53.025,26.018 52.978,25.97 VT5.2@53.003,25.946 53.823,25.125 54.85,25.125 55.18,24.795 A1.5@55.18,23.99
  Bottom Layer w0.2: v1@16.025,11.75 16.625,11.15 16.625,10.125 16.875,9.875 29.825,9.875 34.525,14.575 38.775,14.575 42.025,17.825 42.025,18.1 43.925,20 43.925,24 45.1,25.175 46.55,25.175 46.925,25.55 46.925,26.601 48.15,27.826 49.254,27.826 52.18,24.9 56.55,24.9 v1(56.825,25.175) ; v1(62.75,24.6) 64.925,24.6 65.978,23.547 v1(65.978,22.476)
  Bottom Layer w0.5: 35.125,18.024 v1(37.652,20.551) 38.225,21.124 38.225,22.914 39.112,23.801 v1(39.177,23.801)
  Bottom Layer w2: v1(13.225,15.425) 13.225,14.55 15.737,12.038 v1@16.025,11.75 ; 16.45,11.425 29.2,11.425 35,17.225 36.1,16.125 38.076,16.125 40.027,18.076 40.027,18.316 42.375,20.664 42.375,25.15 47.151,29.926 50.149,29.926 53.025,27.05 v1(53.025,27.025)
  other v1: 15.925,12.225 13.1,14.4
+4.2VDC: C27.1 C29.1 L3.2 R29.2 RI1.2 VD20.2 | length 20.6
  Top Layer w1: VD20.2@6.022,17.7 6.022,19.925 7.247,21.15 13.75,21.15 v1(14.5,20.4) ; 18.475,11.7 RI1.2@18.475,13.775
  Bottom Layer w1: v1(14.5,20.4) 14.5,16.9 v1(17,14.4)
  other v1: 17,13.4 19.7,13.775 39.525,25.125 39.525,26.275 39.5,27.475
+GPS_POW: A1.4 C4.2 C5.1 L1.1 VT5.3 X22.1 | length 28.8
  Top Layer w0.5: L1.1@48.5,30.975 50.925,30.975 C5.1@51.5,30.4 52.05,29.85 VT5.3@52.05,28.105 50.895,28.105 50.6,28.4 C4.2@49.762,28.4
  Top Layer w0.7: C5.1@51.5,30.4 52.9,30.4 53.35,29.95 53.35,28.4 54.1,27.65 54.825,27.65 55.205,27.27 A1.4@55.205,26.53 57.65,26.53 58.705,25.475 62.069,25.475 62.544,25.95 v1(62.775,25.95)
  Bottom Layer w0.7: v1(62.775,25.95) 64.75,25.95 66.275,24.425 67.725,24.425 67.75,24.4 X22.1@67.625,24.4
+MODEM_VCC: C6.1 C7.2 D2.34 D2.35 R1.1 VT8.3 | length 28.9
  Top Layer w0.2: v1(17.85,23.225) 18.754,22.321 VT8.3@18.754,17.425 ; v1(18.325,33.95) 20.775,33.95 22.1,35.275 26.575,35.275 26.9,34.95 26.9,34.725 27.138,34.487 R1.1@27.825,34.487
  Top Layer w0.5: D2.34@24.737,1.225 D2.35@25.837,1.225
  Bottom Layer w0.2: v1@17.8,23.275 17.55,23.525 17.55,33.175 v1(18.325,33.95)
+POWER: C23.2 C24.2 C25.1 C31.1 DA1.7 R25.2 VD8.2 VD9.2 VD10.1 | length 29.1
  Top Layer w0.3: C31.1@53.275,40.1 53.275,39.972 55.125,38.122 55.125,37.35 55.35,37.125 55.35,37.105 56.88,35.575 59.227,35.575 62.664,32.139 62.689,32.139 62.952,31.875 63.576,31.875 64.425,31.026 64.425,30.2 65.5,29.125 65.5,27.05 65.325,26.875 65.325,25.05 64.014,23.739 64.014,20.239 63.512,19.737 R25.2@63.512,18.625
  other v1: 26.625,41.875 34.9,41.925 20.425,42 30.4,42 43.85,42
+POWER_OUT: VD10.2 X15.1 | length 7.1
  Top Layer w1.3: X15.1@12.5,41.4 13.175,41.4 13.625,41.85 ; X15.1@12.5,41.525 12.825,41.85 13.625,41.85 ; VD10.2@17.8,41.05 16.925,41.05 16.125,41.85 v1(14.325,41.85) 13.625,41.85
  other v1: 15.95,41.9
+PWR: R24.1 X11.1 | length 36.4
  Bottom Layer w2: X11.1@1.575,12.375 1.575,30.625 1.55,30.625 1.55,31.7 5,35.15 5.923,35.15 9.698,38.925 14.225,38.925 R24.1@15.225,39.925
AT45_CS: D3.4 R15.1 U1.20 | length 34.1
  Top Layer w0.2: D3.4@43.255,11.35 43.255,11.2 43.65,11.2 44.05,11.6 44.05,13.607 45.418,14.975 50.756,14.975 51.725,15.944 51.725,16.5 52.225,17 53.307,17 54.381,18.075 v1(55.975,18.075) ; v1(57.675,22.25) 57.675,22.202 57.754,22.202 59.178,20.778 59.178,20.074 58.68,19.576 58.301,19.576 58.05,19.325 58.05,16.775 59.625,15.2 U1.20@59.625,14.1
  Top Layer w0.3: R15.1@42.787,9.55 42.8,9.563 42.8,10.125 43.255,10.58 D3.4@43.255,11.2
  Bottom Layer w0.2: v1(55.975,18.075) 55.975,19.936 57.675,21.636 v1(57.675,22.25)
BAT_ADC: C30.2 R30.1 R31.2 U1.8 | length 18.9
  Top Layer w0.2: R30.1@64.613,18.65 64.613,19.413 v1(65.1,19.9)
  Top Layer w0.3: U1.8@62.925,8.3 64.2,8.3 64.362,8.462 C30.2@64.875,8.462 C30.2@65.075,8.462
  Top Layer w0.5: C30.2@65.075,8.462 65.1,8.487 R31.2@67,8.487
  Bottom Layer w0.2: v1(65.1,19.9) 65.1,17.725 63.751,16.376 63.726,16.376 63.228,15.878 63.228,15.174 64.125,14.277 64.125,11.7 65.928,9.897 v1(65.928,8.525)
COUNT_IN_1: R38.1 X18.1 | length 42.3
  Top Layer w0.2: v1(42.577,4.8) 42.577,5.752 42.763,5.938 R38.1@43.45,5.938
  Bottom Layer w0.2: X18.1@9.25,14.15 10.414,14.15 10.6,13.964 10.6,12.764 14.314,9.05 15.027,9.05 16.027,8.05 27.45,8.05 29.5,6 30.111,6 31.261,4.85 38.55,4.85 40.575,2.825 42.069,2.825 42.577,3.333 v1(42.577,4.8)
COUNT_IN_1_MCU: D4.4 U1.39 | length 4.7
  Top Layer w0.2: D4.4@49.05,6.575 49.05,7.25 49.375,7.575 49.6,7.575 50,7.975 50,8.626 50.425,9.051 50.425,9.075 50.65,9.3 U1.39@51.825,9.3
COUNT_IN_2: R39.1 X19.1 | length 41.2
  Top Layer w0.2: v1@42.324,7.599 43.325,8.6 R39.1@43.738,8.6
  Bottom Layer w0.2: X19.1@9.25,16.65 10.525,16.65 10.75,16.425 10.75,14.45 11.05,14.15 11.05,12.95 14.5,9.5 15.213,9.5 16.213,8.5 29.577,8.5 31.377,6.7 39.877,6.7 40.827,7.65 v1(42.227,7.65)
COUNT_IN_2_MCU: D5.4 U1.38 | length 4.6
  Top Layer w0.2: D5.4@49.525,12.375 50.125,12.375 50.3,12.2 50.3,10.125 50.625,9.8 U1.38@51.825,9.8
FM25_CS: DD1.1 R16.1 U1.17 | length 27.4
  Top Layer w0.2: v1(54.412,22.74) 56.015,22.74 56.875,23.6 60.45,23.6 62.787,21.263 62.787,18.142 ; U1.17@61.125,14.1 61.575,14.1 62.187,14.712 62.187,17.579 62.75,18.142
  Top Layer w0.3: R16.1@47,22.863 47,21.805 DD1.1@46.75,21.555 v1@48.47,21.555
  Bottom Layer w0.3: v1(48.55,21.225) 50.875,21.225 52.39,22.74 v1(54.412,22.74)